# Altium PCB 01_UNROUTED_PLACEMENT.PcbDoc (part 4 of 4)
Units mil, origin at the board's own origin, x right, y up, seen from the top; angles counter-clockwise.
Board outline 3149.61 x 1771.65 mil, 4 copper layers (L1 TOP, L2 GND, L3 POWER SIGNAL, L4 BOTTOM GND), stack 45.835 mil thick; 209 components, 132 nets, 746 pads, 5 vias.
Unrouted connection lines stored in the file: 533.
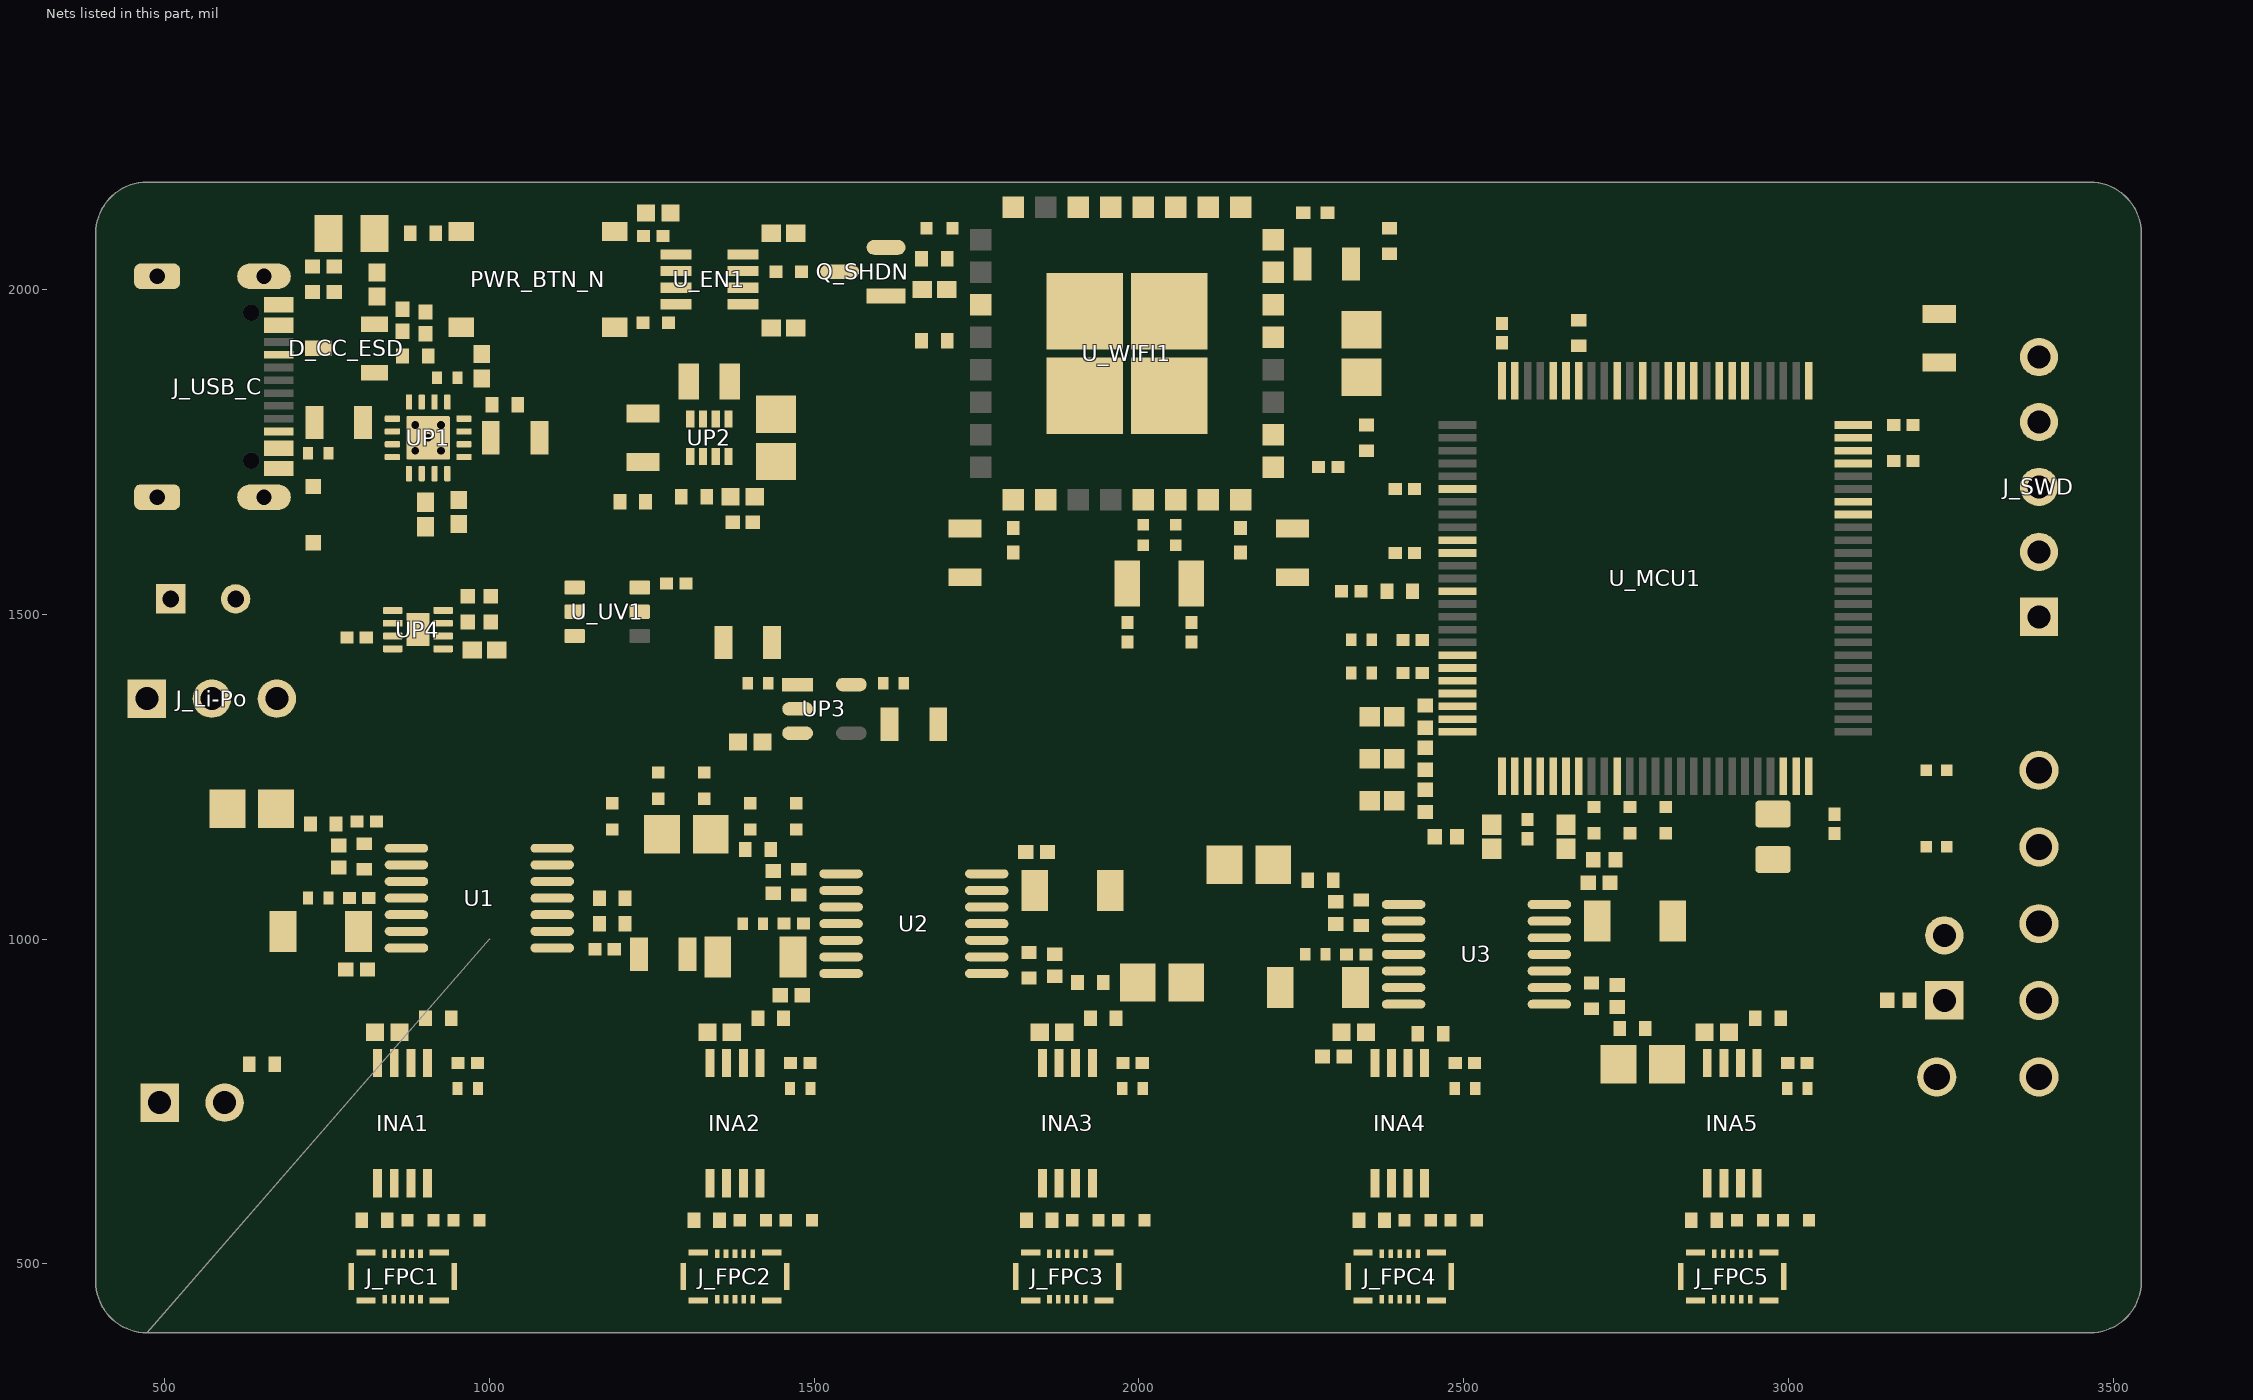
[diagram p2: the nets of this part, all layers, seen from the top]

## Part data (continued)
RDD8: library part EMG_R5_RDD8, "-55℃~+155℃ 50V 5kΩ 63mW Thin Film Resistor ±0.1% ±25ppm/℃ 0402 Chip Resistor - Surface Mount ROH", LCSC Part=C5948099, Manufacturer="Viking Tech", Package=AR0402, Power Rating=0.0625W, Resistance=5KΩ, Temperature="-55°C to +155°C", Temperature Range High=+155°C, Temperature Range Low=-55°C, Tolerance=±0.1%, Voltage Rating=50V, Automotive=No, Automotive Grade="Grade 0", Category="Resistors/Chip Resistor - Surface Mount", ComponentLink2Description=Datasheet, ComponentLink2URL=https://www.viking.com.tw/Templates/att/Thin%20Film%20Resistor%20short%20form.pdf, Composition="Thin Film", Controlled Revision="R5 2026-09-16; project-local frozen symbol/footprint", Device Class L1="Passive Components", Device Class L2=Resistors, Device Class L3="Chip SMD Resistors", Footprint Url=https://www.viking.com.tw/Templates/att/Thin%20Film%20Resistor%20short%20form.pdf, Height=0.35mm, Ipc Land Pattern Name=RESC10050X32, Lead Free=Yes, Manufacturer Part Number=AR02BTC5001, Octopart=https://octopart.com/datasheet/viking-tech/AR02BTC5001, RoHS=TRUE, Series=AR
RDD9: library part EMG_R5_RDD9, Package=None, Availability=Unavailable, Controlled Revision="R5 2026-09-16; project-local frozen symbol/footprint", MP=ERA2ARB103X, Price=None
RDD10: library part EMG_R5_RDD10, Package=None, Availability=Unavailable, Controlled Revision="R5 2026-09-16; project-local frozen symbol/footprint", MP=ERA2ARB103X, Price=None
RDD11: library part EMG_R5_RDD11, "-55℃~+155℃ 50V 5kΩ 63mW Thin Film Resistor ±0.1% ±25ppm/℃ 0402 Chip Resistor - Surface Mount ROH", LCSC Part=C5948099, Manufacturer="Viking Tech", Package=AR0402, Power Rating=0.0625W, Resistance=5KΩ, Temperature="-55°C to +155°C", Temperature Range High=+155°C, Temperature Range Low=-55°C, Tolerance=±0.1%, Voltage Rating=50V, Automotive=No, Automotive Grade="Grade 0", Category="Resistors/Chip Resistor - Surface Mount", ComponentLink2Description=Datasheet, ComponentLink2URL=https://www.viking.com.tw/Templates/att/Thin%20Film%20Resistor%20short%20form.pdf, Composition="Thin Film", Controlled Revision="R5 2026-09-16; project-local frozen symbol/footprint", Device Class L1="Passive Components", Device Class L2=Resistors, Device Class L3="Chip SMD Resistors", Footprint Url=https://www.viking.com.tw/Templates/att/Thin%20Film%20Resistor%20short%20form.pdf, Height=0.35mm, Ipc Land Pattern Name=RESC10050X32, Lead Free=Yes, Manufacturer Part Number=AR02BTC5001, Octopart=https://octopart.com/datasheet/viking-tech/AR02BTC5001, RoHS=TRUE, Series=AR
RDD12: library part EMG_R5_RDD12, Package=None, Availability=Unavailable, Controlled Revision="R5 2026-09-16; project-local frozen symbol/footprint", MP=ERA2ARB103X, Price=None
RDD13: library part EMG_R5_RDD13, Package=None, Availability=Unavailable, Controlled Revision="R5 2026-09-16; project-local frozen symbol/footprint", MP=ERA2ARB103X, Price=None
RDD14: library part EMG_R5_RDD14, "-55℃~+155℃ 50V 5kΩ 63mW Thin Film Resistor ±0.1% ±25ppm/℃ 0402 Chip Resistor - Surface Mount ROH", LCSC Part=C5948099, Manufacturer="Viking Tech", Package=AR0402, Power Rating=0.0625W, Resistance=5KΩ, Temperature="-55°C to +155°C", Temperature Range High=+155°C, Temperature Range Low=-55°C, Tolerance=±0.1%, Voltage Rating=50V, Automotive=No, Automotive Grade="Grade 0", Category="Resistors/Chip Resistor - Surface Mount", ComponentLink2Description=Datasheet, ComponentLink2URL=https://www.viking.com.tw/Templates/att/Thin%20Film%20Resistor%20short%20form.pdf, Composition="Thin Film", Controlled Revision="R5 2026-09-16; project-local frozen symbol/footprint", Device Class L1="Passive Components", Device Class L2=Resistors, Device Class L3="Chip SMD Resistors", Footprint Url=https://www.viking.com.tw/Templates/att/Thin%20Film%20Resistor%20short%20form.pdf, Height=0.35mm, Ipc Land Pattern Name=RESC10050X32, Lead Free=Yes, Manufacturer Part Number=AR02BTC5001, Octopart=https://octopart.com/datasheet/viking-tech/AR02BTC5001, RoHS=TRUE, Series=AR
RDD15: library part EMG_R5_RDD15, Package=None, Availability=Unavailable, Controlled Revision="R5 2026-09-16; project-local frozen symbol/footprint", MP=ERA2ARB103X, Price=None
RG_1: library part EMG_R5_RG_1, "RES SMD 80.6KOHM 0.1% 1/16W 0402", Manufacturer=Yageo, Package=RT0402, Power Rating=0.063W, Resistance=80.6KΩ, Temperature="-55°C to +155°C", Temperature Coefficient="25 ppm/°C", Temperature Range High=+155°C, Temperature Range Low=-55°C, Tolerance=0.001, Voltage Rating=50V, Automotive=No, Category=Res, ComponentLink2Description=Datasheet, ComponentLink2URL=http://www.yageo.com/documents/recent/PYu-RT_1-to-0.01_RoHS_L_9.pdf, Composition="Thin Film", Controlled Revision="R5 2026-09-16; project-local frozen symbol/footprint", Device Class L1="Passive Components", Device Class L2=Resistors, Device Class L3="Chip SMD Resistors", Digikey Description="RES SMD 80.6KOHM 0.1% 1/16W 0402", Footprint Url=http://www.yageo.com/exep/pages/download/literatures/PYu-R_Mount_10.pdf, Height=0.35mm, Ipc Land Pattern Name=RESC10050X30, Lead Free=Yes, Manufacturer Part Number=RT0402BRD0780K6L, Mouser Description="Thin Film Resistors 1/16W 80.6K ohm .1% 25ppm", Octopart=https://octopart.com/rt0402brd0780k6l-yageo-1468076, RoHS=TRUE, Series=RT
RG_2: library part EMG_R5_RG_2, "RES SMD 80.6KOHM 0.1% 1/16W 0402", Manufacturer=Yageo, Package=RT0402, Power Rating=0.063W, Resistance=80.6KΩ, Temperature="-55°C to +155°C", Temperature Coefficient="25 ppm/°C", Temperature Range High=+155°C, Temperature Range Low=-55°C, Tolerance=0.001, Voltage Rating=50V, Automotive=No, Category=Res, ComponentLink2Description=Datasheet, ComponentLink2URL=http://www.yageo.com/documents/recent/PYu-RT_1-to-0.01_RoHS_L_9.pdf, Composition="Thin Film", Controlled Revision="R5 2026-09-16; project-local frozen symbol/footprint", Device Class L1="Passive Components", Device Class L2=Resistors, Device Class L3="Chip SMD Resistors", Digikey Description="RES SMD 80.6KOHM 0.1% 1/16W 0402", Footprint Url=http://www.yageo.com/exep/pages/download/literatures/PYu-R_Mount_10.pdf, Height=0.35mm, Ipc Land Pattern Name=RESC10050X30, Lead Free=Yes, Manufacturer Part Number=RT0402BRD0780K6L, Mouser Description="Thin Film Resistors 1/16W 80.6K ohm .1% 25ppm", Octopart=https://octopart.com/rt0402brd0780k6l-yageo-1468076, RoHS=TRUE, Series=RT
RG_3: library part EMG_R5_RG_3, "RES SMD 80.6KOHM 0.1% 1/16W 0402", Manufacturer=Yageo, Package=RT0402, Power Rating=0.063W, Resistance=80.6KΩ, Temperature="-55°C to +155°C", Temperature Coefficient="25 ppm/°C", Temperature Range High=+155°C, Temperature Range Low=-55°C, Tolerance=0.001, Voltage Rating=50V, Automotive=No, Category=Res, ComponentLink2Description=Datasheet, ComponentLink2URL=http://www.yageo.com/documents/recent/PYu-RT_1-to-0.01_RoHS_L_9.pdf, Composition="Thin Film", Controlled Revision="R5 2026-09-16; project-local frozen symbol/footprint", Device Class L1="Passive Components", Device Class L2=Resistors, Device Class L3="Chip SMD Resistors", Digikey Description="RES SMD 80.6KOHM 0.1% 1/16W 0402", Footprint Url=http://www.yageo.com/exep/pages/download/literatures/PYu-R_Mount_10.pdf, Height=0.35mm, Ipc Land Pattern Name=RESC10050X30, Lead Free=Yes, Manufacturer Part Number=RT0402BRD0780K6L, Mouser Description="Thin Film Resistors 1/16W 80.6K ohm .1% 25ppm", Octopart=https://octopart.com/rt0402brd0780k6l-yageo-1468076, RoHS=TRUE, Series=RT
RG_4: library part EMG_R5_RG_4, "RES SMD 80.6KOHM 0.1% 1/16W 0402", Manufacturer=Yageo, Package=RT0402, Power Rating=0.063W, Resistance=80.6KΩ, Temperature="-55°C to +155°C", Temperature Coefficient="25 ppm/°C", Temperature Range High=+155°C, Temperature Range Low=-55°C, Tolerance=0.001, Voltage Rating=50V, Automotive=No, Category=Res, ComponentLink2Description=Datasheet, ComponentLink2URL=http://www.yageo.com/documents/recent/PYu-RT_1-to-0.01_RoHS_L_9.pdf, Composition="Thin Film", Controlled Revision="R5 2026-09-16; project-local frozen symbol/footprint", Device Class L1="Passive Components", Device Class L2=Resistors, Device Class L3="Chip SMD Resistors", Digikey Description="RES SMD 80.6KOHM 0.1% 1/16W 0402", Footprint Url=http://www.yageo.com/exep/pages/download/literatures/PYu-R_Mount_10.pdf, Height=0.35mm, Ipc Land Pattern Name=RESC10050X30, Lead Free=Yes, Manufacturer Part Number=RT0402BRD0780K6L, Mouser Description="Thin Film Resistors 1/16W 80.6K ohm .1% 25ppm", Octopart=https://octopart.com/rt0402brd0780k6l-yageo-1468076, RoHS=TRUE, Series=RT
RG_5: library part EMG_R5_RG_5, "RES SMD 80.6KOHM 0.1% 1/16W 0402", Manufacturer=Yageo, Package=RT0402, Power Rating=0.063W, Resistance=80.6KΩ, Temperature="-55°C to +155°C", Temperature Coefficient="25 ppm/°C", Temperature Range High=+155°C, Temperature Range Low=-55°C, Tolerance=0.001, Voltage Rating=50V, Automotive=No, Category=Res, ComponentLink2Description=Datasheet, ComponentLink2URL=http://www.yageo.com/documents/recent/PYu-RT_1-to-0.01_RoHS_L_9.pdf, Composition="Thin Film", Controlled Revision="R5 2026-09-16; project-local frozen symbol/footprint", Device Class L1="Passive Components", Device Class L2=Resistors, Device Class L3="Chip SMD Resistors", Digikey Description="RES SMD 80.6KOHM 0.1% 1/16W 0402", Footprint Url=http://www.yageo.com/exep/pages/download/literatures/PYu-R_Mount_10.pdf, Height=0.35mm, Ipc Land Pattern Name=RESC10050X30, Lead Free=Yes, Manufacturer Part Number=RT0402BRD0780K6L, Mouser Description="Thin Film Resistors 1/16W 80.6K ohm .1% 25ppm", Octopart=https://octopart.com/rt0402brd0780k6l-yageo-1468076, RoHS=TRUE, Series=RT
RGN_1: library part EMG_R5_RGN_1, "RES 10.0K OHM 1/16W .1% SMD 0402", Manufacturer=Yageo, Package=RT0402, Power Rating=0.063W, Resistance=10KΩ, Temperature="-55°C to +155°C", Temperature Coefficient="25 ppm/°C", Temperature Range High=+155°C, Temperature Range Low=-55°C, Tolerance=0.001, Voltage Rating=50V, Automotive=No, Category=Res, ComponentLink2Description=Datasheet, ComponentLink2URL=http://www.yageo.com/documents/recent/PYu-RT_1-to-0.01_RoHS_L_9.pdf, Composition="Thin Film", Controlled Revision="R5 2026-09-16; project-local frozen symbol/footprint", Device Class L1="Passive Components", Device Class L2=Resistors, Device Class L3="Chip SMD Resistors", Digikey Description="RES 10.0K OHM 1/16W .1% SMD 0402", Footprint Url=http://www.yageo.com/exep/pages/download/literatures/PYu-R_Mount_10.pdf, Height=0.35mm, Ipc Land Pattern Name=RESC10050X30, Lead Free=Yes, Manufacturer Part Number=RT0402BRD0710KL, Mouser Description="Thin Film Resistors - SMD 10K ohm 0.1% 1/16W", Octopart=https://octopart.com/rt0402brd0710kl-yageo-1181432, RoHS=TRUE, Series=RT
RGN_2: library part EMG_R5_RGN_2, "RES 10.0K OHM 1/16W .1% SMD 0402", Manufacturer=Yageo, Package=RT0402, Power Rating=0.063W, Resistance=10KΩ, Temperature="-55°C to +155°C", Temperature Coefficient="25 ppm/°C", Temperature Range High=+155°C, Temperature Range Low=-55°C, Tolerance=0.001, Voltage Rating=50V, Automotive=No, Category=Res, ComponentLink2Description=Datasheet, ComponentLink2URL=http://www.yageo.com/documents/recent/PYu-RT_1-to-0.01_RoHS_L_9.pdf, Composition="Thin Film", Controlled Revision="R5 2026-09-16; project-local frozen symbol/footprint", Device Class L1="Passive Components", Device Class L2=Resistors, Device Class L3="Chip SMD Resistors", Digikey Description="RES 10.0K OHM 1/16W .1% SMD 0402", Footprint Url=http://www.yageo.com/exep/pages/download/literatures/PYu-R_Mount_10.pdf, Height=0.35mm, Ipc Land Pattern Name=RESC10050X30, Lead Free=Yes, Manufacturer Part Number=RT0402BRD0710KL, Mouser Description="Thin Film Resistors - SMD 10K ohm 0.1% 1/16W", Octopart=https://octopart.com/rt0402brd0710kl-yageo-1181432, RoHS=TRUE, Series=RT
RGN_3: library part EMG_R5_RGN_3, "RES 10.0K OHM 1/16W .1% SMD 0402", Manufacturer=Yageo, Package=RT0402, Power Rating=0.063W, Resistance=10KΩ, Temperature="-55°C to +155°C", Temperature Coefficient="25 ppm/°C", Temperature Range High=+155°C, Temperature Range Low=-55°C, Tolerance=0.001, Voltage Rating=50V, Automotive=No, Category=Res, ComponentLink2Description=Datasheet, ComponentLink2URL=http://www.yageo.com/documents/recent/PYu-RT_1-to-0.01_RoHS_L_9.pdf, Composition="Thin Film", Controlled Revision="R5 2026-09-16; project-local frozen symbol/footprint", Device Class L1="Passive Components", Device Class L2=Resistors, Device Class L3="Chip SMD Resistors", Digikey Description="RES 10.0K OHM 1/16W .1% SMD 0402", Footprint Url=http://www.yageo.com/exep/pages/download/literatures/PYu-R_Mount_10.pdf, Height=0.35mm, Ipc Land Pattern Name=RESC10050X30, Lead Free=Yes, Manufacturer Part Number=RT0402BRD0710KL, Mouser Description="Thin Film Resistors - SMD 10K ohm 0.1% 1/16W", Octopart=https://octopart.com/rt0402brd0710kl-yageo-1181432, RoHS=TRUE, Series=RT
RGN_4: library part EMG_R5_RGN_4, "RES 10.0K OHM 1/16W .1% SMD 0402", Manufacturer=Yageo, Package=RT0402, Power Rating=0.063W, Resistance=10KΩ, Temperature="-55°C to +155°C", Temperature Coefficient="25 ppm/°C", Temperature Range High=+155°C, Temperature Range Low=-55°C, Tolerance=0.001, Voltage Rating=50V, Automotive=No, Category=Res, ComponentLink2Description=Datasheet, ComponentLink2URL=http://www.yageo.com/documents/recent/PYu-RT_1-to-0.01_RoHS_L_9.pdf, Composition="Thin Film", Controlled Revision="R5 2026-09-16; project-local frozen symbol/footprint", Device Class L1="Passive Components", Device Class L2=Resistors, Device Class L3="Chip SMD Resistors", Digikey Description="RES 10.0K OHM 1/16W .1% SMD 0402", Footprint Url=http://www.yageo.com/exep/pages/download/literatures/PYu-R_Mount_10.pdf, Height=0.35mm, Ipc Land Pattern Name=RESC10050X30, Lead Free=Yes, Manufacturer Part Number=RT0402BRD0710KL, Mouser Description="Thin Film Resistors - SMD 10K ohm 0.1% 1/16W", Octopart=https://octopart.com/rt0402brd0710kl-yageo-1181432, RoHS=TRUE, Series=RT
RGN_5: library part EMG_R5_RGN_5, "RES 10.0K OHM 1/16W .1% SMD 0402", Manufacturer=Yageo, Package=RT0402, Power Rating=0.063W, Resistance=10KΩ, Temperature="-55°C to +155°C", Temperature Coefficient="25 ppm/°C", Temperature Range High=+155°C, Temperature Range Low=-55°C, Tolerance=0.001, Voltage Rating=50V, Automotive=No, Category=Res, ComponentLink2Description=Datasheet, ComponentLink2URL=http://www.yageo.com/documents/recent/PYu-RT_1-to-0.01_RoHS_L_9.pdf, Composition="Thin Film", Controlled Revision="R5 2026-09-16; project-local frozen symbol/footprint", Device Class L1="Passive Components", Device Class L2=Resistors, Device Class L3="Chip SMD Resistors", Digikey Description="RES 10.0K OHM 1/16W .1% SMD 0402", Footprint Url=http://www.yageo.com/exep/pages/download/literatures/PYu-R_Mount_10.pdf, Height=0.35mm, Ipc Land Pattern Name=RESC10050X30, Lead Free=Yes, Manufacturer Part Number=RT0402BRD0710KL, Mouser Description="Thin Film Resistors - SMD 10K ohm 0.1% 1/16W", Octopart=https://octopart.com/rt0402brd0710kl-yageo-1181432, RoHS=TRUE, Series=RT
RH_1: library part EMG_R5_RH_1, "RES 26.1kΩ ±0.1% 0.063W 0402", Case Code (Imperial)=0402, Case Code (Metric)=1005, JLCPCB Part=C2075472, Manufacturer=PANASONIC, Max Operating Temperature=155°C, Max Power Dissipation=63mW, Min Operating Temperature=-55°C, Power Rating=62.5mW, Resistance=26.1kR, Resistor Type="Thin Film", Temperature Coefficient=25ppm/°C, Tolerance=0.1%, Voltage Rating=50V, Case/Package=0402, Controlled Revision="R5 2026-09-16; project-local frozen symbol/footprint", Features="Moisture Resistant", Height=0.015inch, Length=0.039inch, Number of Terminations=2, Packaging="Tape and Reel", RoHS Compliant=Yes, Series=ERA-2A, Termination=SMD/SMT, Width=0.5mm
RH_2: library part EMG_R5_RH_2, "RES 26.1kΩ ±0.1% 0.063W 0402", Case Code (Imperial)=0402, Case Code (Metric)=1005, JLCPCB Part=C2075472, Manufacturer=PANASONIC, Max Operating Temperature=155°C, Max Power Dissipation=63mW, Min Operating Temperature=-55°C, Power Rating=62.5mW, Resistance=26.1kR, Resistor Type="Thin Film", Temperature Coefficient=25ppm/°C, Tolerance=0.1%, Voltage Rating=50V, Case/Package=0402, Controlled Revision="R5 2026-09-16; project-local frozen symbol/footprint", Features="Moisture Resistant", Height=0.015inch, Length=0.039inch, Number of Terminations=2, Packaging="Tape and Reel", RoHS Compliant=Yes, Series=ERA-2A, Termination=SMD/SMT, Width=0.5mm
RH_3: library part EMG_R5_RH_3, "RES 26.1kΩ ±0.1% 0.063W 0402", Case Code (Imperial)=0402, Case Code (Metric)=1005, JLCPCB Part=C2075472, Manufacturer=PANASONIC, Max Operating Temperature=155°C, Max Power Dissipation=63mW, Min Operating Temperature=-55°C, Power Rating=62.5mW, Resistance=26.1kR, Resistor Type="Thin Film", Temperature Coefficient=25ppm/°C, Tolerance=0.1%, Voltage Rating=50V, Case/Package=0402, Controlled Revision="R5 2026-09-16; project-local frozen symbol/footprint", Features="Moisture Resistant", Height=0.015inch, Length=0.039inch, Number of Terminations=2, Packaging="Tape and Reel", RoHS Compliant=Yes, Series=ERA-2A, Termination=SMD/SMT, Width=0.5mm
RH_4: library part EMG_R5_RH_4, "RES 26.1kΩ ±0.1% 0.063W 0402", Case Code (Imperial)=0402, Case Code (Metric)=1005, JLCPCB Part=C2075472, Manufacturer=PANASONIC, Max Operating Temperature=155°C, Max Power Dissipation=63mW, Min Operating Temperature=-55°C, Power Rating=62.5mW, Resistance=26.1kR, Resistor Type="Thin Film", Temperature Coefficient=25ppm/°C, Tolerance=0.1%, Voltage Rating=50V, Case/Package=0402, Controlled Revision="R5 2026-09-16; project-local frozen symbol/footprint", Features="Moisture Resistant", Height=0.015inch, Length=0.039inch, Number of Terminations=2, Packaging="Tape and Reel", RoHS Compliant=Yes, Series=ERA-2A, Termination=SMD/SMT, Width=0.5mm
RH_5: library part EMG_R5_RH_5, "RES 26.1kΩ ±0.1% 0.063W 0402", Case Code (Imperial)=0402, Case Code (Metric)=1005, JLCPCB Part=C2075472, Manufacturer=PANASONIC, Max Operating Temperature=155°C, Max Power Dissipation=63mW, Min Operating Temperature=-55°C, Power Rating=62.5mW, Resistance=26.1kR, Resistor Type="Thin Film", Temperature Coefficient=25ppm/°C, Tolerance=0.1%, Voltage Rating=50V, Case/Package=0402, Controlled Revision="R5 2026-09-16; project-local frozen symbol/footprint", Features="Moisture Resistant", Height=0.015inch, Length=0.039inch, Number of Terminations=2, Packaging="Tape and Reel", RoHS Compliant=Yes, Series=ERA-2A, Termination=SMD/SMT, Width=0.5mm
RISET: library part EMG_R5_RISET, Manufacturer=Yageo, Controlled Revision="R5 2026-09-16; project-local frozen symbol/footprint", Part Number=RC0402FR-072K94L
RJ1: library part EMG_R5_RJ1, Manufacturer="Yageo / Phycomp", Controlled Revision="R5 2026-09-16; project-local frozen symbol/footprint", Part Number=RC0402FR-075K1L
RJ2: library part EMG_R5_RJ2, Manufacturer="Yageo / Phycomp", Controlled Revision="R5 2026-09-16; project-local frozen symbol/footprint", Part Number=RC0402FR-075K1L
RL_1: library part EMG_R5_RL_1, "RES SMD 1.07K OHM 0.1% 1/16W", Manufacturer=Yageo, Package=RT0402, Power Rating=0.063W, Resistance=1.07KΩ, Temperature="-55°C to +155°C", Temperature Coefficient="25 ppm/°C", Temperature Range High=+155°C, Temperature Range Low=-55°C, Tolerance=0.001, Voltage Rating=50V, Automotive=No, Category=Res, ComponentLink2Description=Datasheet, ComponentLink2URL=http://www.yageo.com/documents/recent/PYu-RT_1-to-0.01_RoHS_L_9.pdf, Composition="Thin Film", Controlled Revision="R5 2026-09-16; project-local frozen symbol/footprint", Device Class L1="Passive Components", Device Class L2=Resistors, Device Class L3="Chip SMD Resistors", Digikey Description="RES SMD 1.07K OHM 0.1% 1/16W", Footprint Url=http://www.yageo.com/exep/pages/download/literatures/PYu-R_Mount_10.pdf, Height=0.35mm, Ipc Land Pattern Name=RESC10050X30, Lead Free=Yes, Manufacturer Part Number=RT0402BRD071K07L, Mouser Description="Thin Film Resistors 1/16W 1.07K ohm .1% 25ppm", Octopart=https://octopart.com/rt0402brd071k07l-yageo-1400807, RoHS=TRUE, Series=RT
RL_2: library part EMG_R5_RL_2, "RES SMD 1.07K OHM 0.1% 1/16W", Manufacturer=Yageo, Package=RT0402, Power Rating=0.063W, Resistance=1.07KΩ, Temperature="-55°C to +155°C", Temperature Coefficient="25 ppm/°C", Temperature Range High=+155°C, Temperature Range Low=-55°C, Tolerance=0.001, Voltage Rating=50V, Automotive=No, Category=Res, ComponentLink2Description=Datasheet, ComponentLink2URL=http://www.yageo.com/documents/recent/PYu-RT_1-to-0.01_RoHS_L_9.pdf, Composition="Thin Film", Controlled Revision="R5 2026-09-16; project-local frozen symbol/footprint", Device Class L1="Passive Components", Device Class L2=Resistors, Device Class L3="Chip SMD Resistors", Digikey Description="RES SMD 1.07K OHM 0.1% 1/16W", Footprint Url=http://www.yageo.com/exep/pages/download/literatures/PYu-R_Mount_10.pdf, Height=0.35mm, Ipc Land Pattern Name=RESC10050X30, Lead Free=Yes, Manufacturer Part Number=RT0402BRD071K07L, Mouser Description="Thin Film Resistors 1/16W 1.07K ohm .1% 25ppm", Octopart=https://octopart.com/rt0402brd071k07l-yageo-1400807, RoHS=TRUE, Series=RT
RL_3: library part EMG_R5_RL_3, "RES SMD 1.07K OHM 0.1% 1/16W", Manufacturer=Yageo, Package=RT0402, Power Rating=0.063W, Resistance=1.07KΩ, Temperature="-55°C to +155°C", Temperature Coefficient="25 ppm/°C", Temperature Range High=+155°C, Temperature Range Low=-55°C, Tolerance=0.001, Voltage Rating=50V, Automotive=No, Category=Res, ComponentLink2Description=Datasheet, ComponentLink2URL=http://www.yageo.com/documents/recent/PYu-RT_1-to-0.01_RoHS_L_9.pdf, Composition="Thin Film", Controlled Revision="R5 2026-09-16; project-local frozen symbol/footprint", Device Class L1="Passive Components", Device Class L2=Resistors, Device Class L3="Chip SMD Resistors", Digikey Description="RES SMD 1.07K OHM 0.1% 1/16W", Footprint Url=http://www.yageo.com/exep/pages/download/literatures/PYu-R_Mount_10.pdf, Height=0.35mm, Ipc Land Pattern Name=RESC10050X30, Lead Free=Yes, Manufacturer Part Number=RT0402BRD071K07L, Mouser Description="Thin Film Resistors 1/16W 1.07K ohm .1% 25ppm", Octopart=https://octopart.com/rt0402brd071k07l-yageo-1400807, RoHS=TRUE, Series=RT
RL_4: library part EMG_R5_RL_4, "RES SMD 1.07K OHM 0.1% 1/16W", Manufacturer=Yageo, Package=RT0402, Power Rating=0.063W, Resistance=1.07KΩ, Temperature="-55°C to +155°C", Temperature Coefficient="25 ppm/°C", Temperature Range High=+155°C, Temperature Range Low=-55°C, Tolerance=0.001, Voltage Rating=50V, Automotive=No, Category=Res, ComponentLink2Description=Datasheet, ComponentLink2URL=http://www.yageo.com/documents/recent/PYu-RT_1-to-0.01_RoHS_L_9.pdf, Composition="Thin Film", Controlled Revision="R5 2026-09-16; project-local frozen symbol/footprint", Device Class L1="Passive Components", Device Class L2=Resistors, Device Class L3="Chip SMD Resistors", Digikey Description="RES SMD 1.07K OHM 0.1% 1/16W", Footprint Url=http://www.yageo.com/exep/pages/download/literatures/PYu-R_Mount_10.pdf, Height=0.35mm, Ipc Land Pattern Name=RESC10050X30, Lead Free=Yes, Manufacturer Part Number=RT0402BRD071K07L, Mouser Description="Thin Film Resistors 1/16W 1.07K ohm .1% 25ppm", Octopart=https://octopart.com/rt0402brd071k07l-yageo-1400807, RoHS=TRUE, Series=RT
RL_5: library part EMG_R5_RL_5, "RES SMD 1.07K OHM 0.1% 1/16W", Manufacturer=Yageo, Package=RT0402, Power Rating=0.063W, Resistance=1.07KΩ, Temperature="-55°C to +155°C", Temperature Coefficient="25 ppm/°C", Temperature Range High=+155°C, Temperature Range Low=-55°C, Tolerance=0.001, Voltage Rating=50V, Automotive=No, Category=Res, ComponentLink2Description=Datasheet, ComponentLink2URL=http://www.yageo.com/documents/recent/PYu-RT_1-to-0.01_RoHS_L_9.pdf, Composition="Thin Film", Controlled Revision="R5 2026-09-16; project-local frozen symbol/footprint", Device Class L1="Passive Components", Device Class L2=Resistors, Device Class L3="Chip SMD Resistors", Digikey Description="RES SMD 1.07K OHM 0.1% 1/16W", Footprint Url=http://www.yageo.com/exep/pages/download/literatures/PYu-R_Mount_10.pdf, Height=0.35mm, Ipc Land Pattern Name=RESC10050X30, Lead Free=Yes, Manufacturer Part Number=RT0402BRD071K07L, Mouser Description="Thin Film Resistors 1/16W 1.07K ohm .1% 25ppm", Octopart=https://octopart.com/rt0402brd071k07l-yageo-1400807, RoHS=TRUE, Series=RT
Rservo_1: library part EMG_R5_Rservo_1, Manufacturer="Yageo / Phycomp", Controlled Revision="R5 2026-09-16; project-local frozen symbol/footprint", Part Number=RC0402FR-072ML
Rservo_2: library part EMG_R5_Rservo_2, Manufacturer="Yageo / Phycomp", Controlled Revision="R5 2026-09-16; project-local frozen symbol/footprint", Part Number=RC0402FR-072ML
Rservo_3: library part EMG_R5_Rservo_3, Manufacturer="Yageo / Phycomp", Controlled Revision="R5 2026-09-16; project-local frozen symbol/footprint", Part Number=RC0402FR-072ML
Rservo_4: library part EMG_R5_Rservo_4, Manufacturer="Yageo / Phycomp", Controlled Revision="R5 2026-09-16; project-local frozen symbol/footprint", Part Number=RC0402FR-072ML
Rservo_5: library part EMG_R5_Rservo_5, Manufacturer="Yageo / Phycomp", Controlled Revision="R5 2026-09-16; project-local frozen symbol/footprint", Part Number=RC0402FR-072ML
RUP_3: library part EMG_R5_RUP_3, "RES 560kΩ ±1% 0.063W 0402", Case/Package=0402, Max Operating Temperature=155°C, Max Power Dissipation=63mW, Min Operating Temperature=-55°C, Resistance=560kR, Resistor Type="Thick Film", Temperature Coefficient=100ppm/°C, Tolerance=1%, Controlled Revision="R5 2026-09-16; project-local frozen symbol/footprint", Features="Moisture Resistant", Height=0.015inch, Length=0.039inch, Number of Terminations=2, Packaging="Tape and Reel", RoHS Compliant=Yes, Series=AC, Width=0.02inch
RUP_4: library part EMG_R5_RUP_4, "AC0402 100KΩ 0.0625W 1.00%", Manufacturer=Yageo, Package=AC0402, Power Rating=0.0625W, Resistance=100KΩ, Temperature="-55°C to +155°C", Temperature Range High=+155°C, Temperature Range Low=-55°C, Tolerance=0.01, Voltage Rating=50V, Automotive=Yes, Automotive Grade="Grade 0", Category=Res, ComponentLink2Description=Datasheet, ComponentLink2URL=http://www.yageo.com/documents/recent/PYu-AC_51_RoHS_L_6.pdf, Composition="Thick Film", Controlled Revision="R5 2026-09-16; project-local frozen symbol/footprint", Device Class L1="Passive Components", Device Class L2=Resistors, Device Class L3="Chip SMD Resistors", Footprint Url=http://www.yageo.com/exep/pages/download/literatures/PYu-R_Mount_10.pdf, Height=0.37mm, Ipc Land Pattern Name=RESC10050X32, Lead Free=Yes, Manufacturer Part Number=AC0402FR-7D100KL, Octopart=https://octopart.com/ac0402fr-7d100kl-yageo-91024821, RoHS=TRUE, Series=AC
RV1: library part EMG_R5_RV1, "AC0402 100KΩ 0.0625W 1.00%", Manufacturer=Yageo, Package=AC0402, Power Rating=0.0625W, Resistance=100KΩ, Temperature="-55°C to +155°C", Temperature Range High=+155°C, Temperature Range Low=-55°C, Tolerance=0.01, Voltage Rating=50V, Automotive=Yes, Automotive Grade="Grade 0", Category=Res, ComponentLink2Description=Datasheet, ComponentLink2URL=http://www.yageo.com/documents/recent/PYu-AC_51_RoHS_L_6.pdf, Composition="Thick Film", Controlled Revision="R5 2026-09-16; project-local frozen symbol/footprint", Device Class L1="Passive Components", Device Class L2=Resistors, Device Class L3="Chip SMD Resistors", Footprint Url=http://www.yageo.com/exep/pages/download/literatures/PYu-R_Mount_10.pdf, Height=0.37mm, Ipc Land Pattern Name=RESC10050X32, Lead Free=Yes, Manufacturer Part Number=AC0402FR-7D100KL, Octopart=https://octopart.com/ac0402fr-7d100kl-yageo-91024821, RoHS=TRUE, Series=AC
RV2: library part EMG_R5_RV2, "AC0402 100KΩ 0.0625W 1.00%", Manufacturer=Yageo, Package=AC0402, Power Rating=0.0625W, Resistance=100KΩ, Temperature="-55°C to +155°C", Temperature Range High=+155°C, Temperature Range Low=-55°C, Tolerance=0.01, Voltage Rating=50V, Automotive=Yes, Automotive Grade="Grade 0", Category=Res, ComponentLink2Description=Datasheet, ComponentLink2URL=http://www.yageo.com/documents/recent/PYu-AC_51_RoHS_L_6.pdf, Composition="Thick Film", Controlled Revision="R5 2026-09-16; project-local frozen symbol/footprint", Device Class L1="Passive Components", Device Class L2=Resistors, Device Class L3="Chip SMD Resistors", Footprint Url=http://www.yageo.com/exep/pages/download/literatures/PYu-R_Mount_10.pdf, Height=0.37mm, Ipc Land Pattern Name=RESC10050X32, Lead Free=Yes, Manufacturer Part Number=AC0402FR-7D100KL, Octopart=https://octopart.com/ac0402fr-7d100kl-yageo-91024821, RoHS=TRUE, Series=AC
TP_GND: library part EMG_R5_TP_GND, "UltraLow Profile THM Test Point-No Base", Package=None, Check_prices=https://www.snapeda.com/parts/5021/Keystone/view-part/?ref=eda, Controlled Revision="R5 2026-09-16; project-local frozen symbol/footprint", MF="Keystone Electronics", MP=5021, SnapEDA_Link=https://www.snapeda.com/parts/5021/Keystone/view-part/?ref=snap
TP_MCU_BOOT0: library part EMG_R5_TP_MCU_BOOT0, "UltraLow Profile THM Test Point-No Base", Package=None, Check_prices=https://www.snapeda.com/parts/5021/Keystone/view-part/?ref=eda, Controlled Revision="R5 2026-09-16; project-local frozen symbol/footprint", MF="Keystone Electronics", MP=5021, SnapEDA_Link=https://www.snapeda.com/parts/5021/Keystone/view-part/?ref=snap
TP_WIFI_BOOT: library part EMG_R5_TP_WIFI_BOOT, "UltraLow Profile THM Test Point-No Base", Package=None, Check_prices=https://www.snapeda.com/parts/5021/Keystone/view-part/?ref=eda, Controlled Revision="R5 2026-09-16; project-local frozen symbol/footprint", MF="Keystone Electronics", MP=5021, SnapEDA_Link=https://www.snapeda.com/parts/5021/Keystone/view-part/?ref=snap
TP_WIFI_CHIP_EN: library part EMG_R5_TP_WIFI_CHIP_EN, "UltraLow Profile THM Test Point-No Base", Package=None, Check_prices=https://www.snapeda.com/parts/5021/Keystone/view-part/?ref=eda, Controlled Revision="R5 2026-09-16; project-local frozen symbol/footprint", MF="Keystone Electronics", MP=5021, SnapEDA_Link=https://www.snapeda.com/parts/5021/Keystone/view-part/?ref=snap
TP_WIFI_UART_RX: library part EMG_R5_TP_WIFI_UART_RX, "UltraLow Profile THM Test Point-No Base", Package=None, Check_prices=https://www.snapeda.com/parts/5021/Keystone/view-part/?ref=eda, Controlled Revision="R5 2026-09-16; project-local frozen symbol/footprint", MF="Keystone Electronics", MP=5021, SnapEDA_Link=https://www.snapeda.com/parts/5021/Keystone/view-part/?ref=snap
TP_WIFI_UART_TX: library part EMG_R5_TP_WIFI_UART_TX, "UltraLow Profile THM Test Point-No Base", Package=None, Check_prices=https://www.snapeda.com/parts/5021/Keystone/view-part/?ref=eda, Controlled Revision="R5 2026-09-16; project-local frozen symbol/footprint", MF="Keystone Electronics", MP=5021, SnapEDA_Link=https://www.snapeda.com/parts/5021/Keystone/view-part/?ref=snap
U1: library part EMG_R5_U1, "None", Case/Package=TSSOP, Input Bias Current=100pA, Input Offset Voltage (Vos)=4.5mV, Max Operating Temperature=125°C, Max Supply Voltage=6V, Min Operating Temperature=-40°C, Min Supply Voltage=1.8V, Nominal Supply Current=45uA, Output Current=15mA, Power Supply Rejection Ratio (PSRR)=63dB, Voltage Gain=110dB, Amplifier Type="GENERAL PURPOSE", Common Mode Rejection Ratio=56dB, Controlled Revision="R5 2026-09-16; project-local frozen symbol/footprint", Gain Bandwidth Product=1MHz, Lead Free="Lead Free", Mount="Surface Mount", Number of Channels=4, Number of Circuits=4, Number of Elements=4, Number of Pins=14, Packaging="Tape and Reel", RoHS Compliant=Yes, Slew Rate=0.5V/µs, Supply Current=45uA, Technology=CMOS, Unity Gain Bandwidth Product=1MHz
U2: library part EMG_R5_U2, "None", Case/Package=TSSOP, Input Bias Current=100pA, Input Offset Voltage (Vos)=4.5mV, Max Operating Temperature=125°C, Max Supply Voltage=6V, Min Operating Temperature=-40°C, Min Supply Voltage=1.8V, Nominal Supply Current=45uA, Output Current=15mA, Power Supply Rejection Ratio (PSRR)=63dB, Voltage Gain=110dB, Amplifier Type="GENERAL PURPOSE", Common Mode Rejection Ratio=56dB, Controlled Revision="R5 2026-09-16; project-local frozen symbol/footprint", Gain Bandwidth Product=1MHz, Lead Free="Lead Free", Mount="Surface Mount", Number of Channels=4, Number of Circuits=4, Number of Elements=4, Number of Pins=14, Packaging="Tape and Reel", RoHS Compliant=Yes, Slew Rate=0.5V/µs, Supply Current=45uA, Technology=CMOS, Unity Gain Bandwidth Product=1MHz
U3: library part EMG_R5_U3, "None", Case/Package=TSSOP, Input Bias Current=100pA, Input Offset Voltage (Vos)=4.5mV, Max Operating Temperature=125°C, Max Supply Voltage=6V, Min Operating Temperature=-40°C, Min Supply Voltage=1.8V, Nominal Supply Current=45uA, Output Current=15mA, Power Supply Rejection Ratio (PSRR)=63dB, Voltage Gain=110dB, Amplifier Type="GENERAL PURPOSE", Common Mode Rejection Ratio=56dB, Controlled Revision="R5 2026-09-16; project-local frozen symbol/footprint", Gain Bandwidth Product=1MHz, Lead Free="Lead Free", Mount="Surface Mount", Number of Channels=4, Number of Circuits=4, Number of Elements=4, Number of Pins=14, Packaging="Tape and Reel", RoHS Compliant=Yes, Slew Rate=0.5V/µs, Supply Current=45uA, Technology=CMOS, Unity Gain Bandwidth Product=1MHz
U_EN1: library part EMG_R5_U_EN1, "Pushbutton On / Off  Controller with µP Interrupt, 8-pin SOT23 (TS8-8), -40 to 85 degC, Pb-Free, Mini Tape and Reel", Manufacturer="Linear Technology", Code_JEDEC=MO-193, ComponentLink1Description="Manufacturer URL", ComponentLink1URL=http://www.linear.com/, ComponentLink2Description=Datasheet, ComponentLink2URL=http://cds.linear.com/docs/en/datasheet/2954fb.pdf, ComponentLink3Description="Package Specification", ComponentLink3URL=http://cds.linear.com/docs/en/packaging/SOT_8_05-08-1637.pdf, Controlled Revision="R5 2026-09-16; project-local frozen symbol/footprint", DatasheetVersion="Rev. B", Mounting Technology="Surface Mount", Number of Supplies(#)=1, PackageDescription="8-Pin Plastic TSOT-23, Body 2.9 x 1.63 mm, Pitch 0.65 mm", PackageReference=TS8-8, PackageVersion="Rev. A, 08/2010", Packing="Mini Tape and Reel", PartNumber=LTC2954ITS8-1#TRMPBF, RoHS=TRUE
U_MCU1: library part EMG_R5_U_MCU1, "Integrated Circuit", Manufacturer_Name=STMicroelectronics, Mouser Part Number=511-STM32U575VIT6, Arrow Part Number=STM32U575VIT6, Arrow Price/Stock=https://www.arrow.com/en/products/stm32u575vit6/stmicroelectronics.html?utm_currency=USD&region=nac, Controlled Revision="R5 2026-09-16; project-local frozen symbol/footprint", Datasheet Link=https://www.st.com/resource/en/datasheet/stm32u575ag.pdf, Height=1.6mm, Manufacturer_Part_Number=STM32U575VIT6, Mouser Price/Stock=https://www.mouser.co.uk/ProductDetail/STMicroelectronics/STM32U575VIT6?qs=DRkmTr78QAR9I8TWG1L7Og%3D%3D
U_UV1: library part EMG_R5_U_UV1, "Low Quiescent Current, Programmable-Delay Supervisory Circuit, 1 Supply Monitored, -40 to 125 degC, 6-pin SOT-23 (DBV), Green (RoHS & no Sb/Br)", Manufacturer="Texas Instruments", Rating=Catalog, Threshold Voltage 1 (typ)(Typ)(V)=3.07, # of Supplies Monitored=1, Code_JEDEC=MO-178-AB*, ComponentLink1Description=Datasheet, ComponentLink1URL=http://www.ti.com/general/docs/lit/getliterature.tsp?genericPartNumber=TPS3808G33&fileType=pdf, Controlled Revision="R5 2026-09-16; project-local frozen symbol/footprint", DatasheetVersion=SBVS050J, Iq(Typ)(uA)=2.4, Mounting Technology="Surface Mount", Output Driver Type / Reset Output="Active-low, Open-drain", PackageDescription="6-Pin Plastic Small-Outline Package, 2.9 x 1.6 mm Body, 0.95 mm Pitch, 2.8 mm Lead Span", PackageReference=DBV0006A, PackageVersion="revK, Mar-2006", PartNumber=TPS3808G33DBVR, Reset Threshold Accuracy(%)=0.5, SubFamily="Supervisor and Reset IC", Time Delay(ms)=Programmable, VCC(Max)(V)=6.5, VCC(Min)(V)=1.7
U_WIFI1: library part EMG_R5_U_WIFI1, "Integrated Circuit", Manufacturer_Name=STMicroelectronics, Arrow Part Number=ST67W611M1A6BTR, Arrow Price/Stock=https://www.arrow.com/en/products/st67w611m1a6btr/stmicroelectronics.html?utm_currency=USD&region=nac, Controlled Revision="R5 2026-09-16; project-local frozen symbol/footprint", Datasheet Link=https://www.st.com/resource/en/datasheet/st67w611m1.pdf, Height=2.37mm, Manufacturer_Part_Number=ST67W611M1A6BTR
UP1: library part EMG_R5_UP1, "BQ24072T single-cell Li-ion charger with dynamic power path; OUT tracks battery +225mV with 3.4V minimum regulation under USB power", Manufacturer="Texas Instruments", Over Voltage Protection=N, Code_JEDEC=MO-220, ComponentLink1Description=Datasheet, ComponentLink1URL=http://www.ti.com/general/docs/lit/getliterature.tsp?genericPartNumber=BQ24072T&fileType=pdf, Controlled Revision="R5 2026-09-16; project-local frozen symbol/footprint", DatasheetVersion=SLUS937A, Eco-Plan="Green (RoHS & no Sb/Br)", Lead Acid=N, Li-Ion=Y, Li-Polymer=Y, Manufacturer Part Number=BQ24072TRGTR, Mounting Technology="Surface Mount", NiCd=N, NiMH=N, PackageDescription="16-Pin Plastic Quad Flat No-Lead, 3 x 3 mm Body, 0.5 mm Pitch, 1.7 x 1.7 mm Exposed Pad", PackageReference=RGT0016C, PackageVersion="revH, Oct-2011", PartNumber=BQ24072TRGTR, SubFamily="Battery Charge Management", Vin(Min)(V)=4.3
UP2: library part EMG_R5_UP2, "1.5-A output current, high-power-density buck-boost converter", Package="SOT-583 Texas Instruments", Check_prices=https://www.snapeda.com/parts/TPS631000DRLR/Texas+Instruments/view-part/?ref=eda, Controlled Revision="R5 2026-09-16; project-local frozen symbol/footprint", MF="Texas Instruments", MP=TPS631000DRLR, SnapEDA_Link=https://www.snapeda.com/parts/TPS631000DRLR/Texas+Instruments/view-part/?ref=snap
UP3: library part EMG_R5_UP3, "IC REG LINEAR 3V 300MA SOT23-5", Controlled Revision="R5 2026-09-16; project-local frozen symbol/footprint", RoHS Compliant=Yes
UP4: library part EMG_R5_UP4, "3ÂµA 1-Cell/2-Cell Fuel Gauge with ModelGauge", Package="TDFN-8 Maxim", Availability="In Stock", Check_prices=https://www.snapeda.com/parts/MAX17048G+T10/Analog+Devices/view-part/?ref=eda, Controlled Revision="R5 2026-09-16; project-local frozen symbol/footprint", MF="Analog Devices", MP=MAX17048G+T10, Price=None, Purchase-URL=https://pricing.snapeda.com/search/part/MAX17048G+T10/?ref=eda, SnapEDA_Link=https://www.snapeda.com/parts/MAX17048G+T10/Analog+Devices/view-part/?ref=snap
X_WIFI_32K: library part EMG_R5_X_WIFI_32K, "Epson FC-135 32.768 kHz 9 pF +/-20 ppm, ESR 70 kohm max, 3.2x1.5 mm, 2 terminals", Frequency="32.768 kHz", Load Capacitance="9 pF", Manufacturer="Seiko Epson Corporation", Package="SMD3215 / 3.2 x 1.5 mm / 2 terminal", Temperature Range="-40 to +85 degC", Tolerance="+/-20 ppm at 25 degC, 0.1 uW", Controlled Revision="R5 2026-09-16; project-local frozen symbol/footprint", Datasheet Link=https://download.epsondevice.com/td/pdf/td_xtal_32khz/FC-135_Q13FC13500003_en.pdf, Drive Level="0.1 uW nominal; 0.5 uW maximum", ESR="70 kohm maximum", Height="0.8 +/-0.1 mm", Manufacturer Part Number=Q13FC13500003, Packaging Note="Q13FC13500003xx; xx=00 is 3000/reel"

## Via types
v1: diameter 19.68, hole 11.81, L1 TOP to L4 BOTTOM GND, 5 vias

## Nets (pads, with @x,y where several pads share a name; then routed paths per layer and width w, separated by ;. In a path a pad name is that pad's centre, name@x,y a point inside that pad or via, vN(x,y) a via of type N, cw(c..) or ccw(c..) an arc to the next point about the centre after c; other vN are vias at no path point)
3V0_ANA: C1_MCU.1 C2_MCU.2 C3_MCU.1 C4_MCU.2 CCU1.1 CCU2.2 CCU3.2 CCU4.1 CCU5.2 CCU6.1 CCU7.2 CCU8.1 CCU9.2 CCU10.1 Cdiv.2 CU_11.2 CU_12.2 CU_14.2 CU_21.1 CU_22.1 CU_24.1 CUP5_2.2 CUP5_3.2 INA1.5 INA2.5 INA3.5 INA4.5 INA5.5 J_FPC1.P1_1 J_FPC1.P1_2 J_FPC1.P1_3 J_FPC2.P1_1 J_FPC2.P1_2 J_FPC2.P1_3 J_FPC3.P1_1 J_FPC3.P1_2 J_FPC3.P1_3 J_FPC4.P1_1 J_FPC4.P1_2 J_FPC4.P1_3 J_FPC5.P1_1 J_FPC5.P1_2 J_FPC5.P1_3 RV2.1 U1.4 U2.4 U3.4 U_MCU1.21 U_MCU1.22 UP3.5
3V3_DIG: C_MCU_BULK.1 C_MCU_VDD1.2 C_MCU_VDD2.2 C_MCU_VDD3.2 C_MCU_VDD4.1 C_MCU_VDD5.1 C_VBAT.2 C_VDDUSB.1 C_WIFI_BULK.2 C_WIFI_VDD33.1 C_WIFI_VDD33_HF.1 C_WIFI_VDDIO1.2 C_WIFI_VDDIO1_HF.1 C_WIFI_VDDIO2.2 C_WIFI_VDDIO2_HF.2 CUP4.1 CUP4_FB.2 CUP5_1.1 CUP5_5.1 J_SWD.1 R_AL.2 R_INT_PULLUP.1 R_KILL_PU.2 R_NRST.2 R_PGOOD.2 R_SCL.2 R_SDA.2 R_WIFI_BOOT_OVR.1 RUP_3.2 U_MCU1.6 U_MCU1.11 U_MCU1.28 U_MCU1.50 U_MCU1.73 U_MCU1.75 U_MCU1.100 U_WIFI1.9 U_WIFI1.16 U_WIFI1.25 UP2.1 UP2.6 UP3.1
ADC_EMG1: C_ADC1.1 R_ADC1.2 U_MCU1.23
ADC_EMG2: C_ADC2.1 R_ADC2.2 U_MCU1.24
ADC_EMG3: C_ADC3.1 R_ADC3.2 U_MCU1.25
ADC_EMG4: C_ADC4.1 R_ADC4.2 U_MCU1.26
ADC_EMG5: C_ADC5.1 R_ADC5.2 U_MCU1.29
AFE_EN: R_EN_PD.1 U_MCU1.85 UP3.3
BAT_TEMP: J_Li-Po.2 R_TH_BAT.2 R_TS_BOTTOM.2 R_TS_SER.1 R_TS_TOP.1
FG_ALRT: R_AL.1 U_MCU1.81 UP4.5
GND: C1_EN1.1 C1_MCU.2 C2_EN1.2 C2_MCU.1 C3_EN1.1 C3_MCU.2 C4_MCU.1 C_ADC1.2 C_ADC2.2 C_ADC3.2 C_ADC4.2 C_ADC5.2 C_BAT.2 C_IN_.2 C_MCU_BULK.2 C_MCU_VDD1.1 C_MCU_VDD2.1 C_MCU_VDD3.1 C_MCU_VDD4.2 C_MCU_VDD5.2 C_NRST.2 C_OUT_.2 C_UV_BYPASS.2 C_VBAT.1 C_VBUS.1 C_VDDUSB.2 C_WIFI_BULK.1 C_WIFI_EN.2 C_WIFI_VDD33.2 C_WIFI_VDD33_HF.2 C_WIFI_VDDIO1.1 C_WIFI_VDDIO1_HF.2 C_WIFI_VDDIO2.1 C_WIFI_VDDIO2_HF.1 C_WIFI_X32_IN.1 C_WIFI_X32_OUT.1 CCU1.2 CCU2.1 CCU3.1 CCU4.2 CCU5.1 CCU6.2 CCU7.1 CCU8.2 CCU9.1 CCU10.2 Cdiv.1 Cdiv_1.1 Cdiv_10uF.1 CU6_1.1 CU_11.1 CU_12.1 CU_14.1 CU_21.2 CU_22.2 CU_24.2 CUP4.2 CUP4_1.2 CUP5_1.2 CUP5_2.1 CUP5_3.1 CUP5_5.2 D_CC_ESD.3 D_VBUS.2 INA1.1 INA1.4 INA2.1 INA2.4 INA3.1 INA3.4 INA4.1 INA4.4 INA5.1 INA5.4 J_FPC1.1 J_FPC1.3 J_FPC1.5 J_FPC1.7 J_FPC1.9 J_FPC1.10 J_FPC1.P2_1 J_FPC1.P2_2 J_FPC1.P2_3 J_FPC2.1 J_FPC2.3 J_FPC2.5 J_FPC2.7 J_FPC2.9 J_FPC2.10 J_FPC2.P2_1 J_FPC2.P2_2 J_FPC2.P2_3 J_FPC3.1 J_FPC3.3 J_FPC3.5 J_FPC3.7 J_FPC3.9 J_FPC3.10 J_FPC3.P2_1 J_FPC3.P2_2 J_FPC3.P2_3 J_FPC4.1 J_FPC4.3 J_FPC4.5 J_FPC4.7 J_FPC4.9 J_FPC4.10 J_FPC4.P2_1 J_FPC4.P2_2 J_FPC4.P2_3 J_FPC5.1 J_FPC5.3 J_FPC5.5 J_FPC5.7 J_FPC5.9 J_FPC5.10 J_FPC5.P2_1 J_FPC5.P2_2 J_FPC5.P2_3 J_Li-Po.1 J_SWD.3 J_USB_C.A1_B12 J_USB_C.B1_A12 J_USB_C.SH1 J_USB_C.SH2 J_USB_C.SH3 J_USB_C.SH4 MCU_VCAP.1 PWR_BTN_N.C PWR_BTN_N.D Q_SHDN.2 R_EN_PD.2 R_LIM.1 R_MCU_BOOT0_PD.1 R_SHDN_PD.1 R_TH_BAT.1 R_TMR.1 R_TS_BOTTOM.1 R_WIFI_BOOT_PD.1 R_WIFI_CS_PD.2 R_WIFI_EN_PD.2 RISET.2 RJ1.1 RJ2.1 RUP_4.1 RV1.2 TP_GND.TP U1.11 U2.11 U3.11 U_EN1.4 U_MCU1.10 U_MCU1.19 U_MCU1.20 U_MCU1.27 U_MCU1.49 U_MCU1.74 U_MCU1.99 U_UV1.2 U_WIFI1.10 U_WIFI1.15 U_WIFI1.18 U_WIFI1.26 U_WIFI1.30 U_WIFI1.32 U_WIFI1.33 U_WIFI1.34 U_WIFI1.35 U_WIFI1.36 UP1.4 UP1.5 UP1.8 UP1.15 UP1.17@905.51,1771.65 UP2.7 UP3.2 UP4.1 UP4.4 UP4.6 UP4.9
  other v1: 885.83,1751.97 925.2,1751.97 905.51,1771.65 885.83,1791.34 925.2,1791.34
I2C_SCL: R_SCL.1 U_MCU1.95 UP4.7
I2C_SDA: R_SDA.1 U_MCU1.96 UP4.8
INA_OUT_1: CL_1.2 INA1.8 RH_1.1 Rservo_1.2
INA_OUT_2: CL_2.2 INA2.8 RH_2.1 Rservo_2.2
INA_OUT_3: CL_3.2 INA3.8 RH_3.1 Rservo_3.2
INA_OUT_4: CL_4.2 INA4.8 RH_4.1 Rservo_4.2
INA_OUT_5: CL_5.2 INA5.8 RH_5.1 Rservo_5.2
KILL_CTRL: Q_SHDN.3 R_KILL_PU.1 U_EN1.8
MCU_BOOT0: R_MCU_BOOT0_PD.2 TP_MCU_BOOT0.TP U_MCU1.94
MCU_NRST: C_NRST.1 J_SWD.5 R_NRST.1 U_MCU1.14
MCU_PWR_INT_N: R_INT_PULLUP.2 U_EN1.5 U_MCU1.83
MCU_SHUTDOWN: R_SHDN_G.2 U_MCU1.86
MCU_SPI_MISO: R_SPI_MISO.2 U_MCU1.31
MCU_SPI_MOSI: R_SPI_MOSI.2 U_MCU1.32
MCU_SPI_SCK: R_SPI_SCK.2 U_MCU1.30
MCU_SWCLK: J_SWD.4 U_MCU1.76
MCU_SWDIO: J_SWD.2 U_MCU1.72
MCU_VCAP: MCU_VCAP.2 U_MCU1.48
MCU_WIFI_CS: R_SPI_CS.2 U_MCU1.35
MCU_WIFI_UART_RX: R_WIFI_UART_RX_LINK.2 U_MCU1.69
MCU_WIFI_UART_TX: R_WIFI_UART_TX_LINK.2 U_MCU1.68
NetC1_EN1_2: C1_EN1.2 R_EN1_1.2 U_EN1.1
NetC2_EN1_1: C2_EN1.1 U_EN1.3
NetC3_EN1_2: C3_EN1.2 U_EN1.7
NetC_WIFI_X32_IN_2: C_WIFI_X32_IN.2 R_WIFI_X32_IN.1 X_WIFI_32K.1
NetC_WIFI_X32_OUT_2: C_WIFI_X32_OUT.2 R_WIFI_X32_OUT.1 X_WIFI_32K.2
NetCH_1_2: CH_1.2 RG_1.1 RGN_1.2 U1.2
NetCH_2_2: CH_2.2 RG_2.1 RGN_2.2 U2.2
NetCH_3_2: CH_3.2 RG_3.1 RGN_3.2 U2.9
NetCH_4_2: CH_4.2 RG_4.1 RGN_4.2 U3.2
NetCH_5_2: CH_5.2 RG_5.1 RGN_5.2 U3.9
NetCL_1_1: CL_1.1 RGN_1.1
NetCL_2_1: CL_2.1 RGN_2.1
NetCL_3_1: CL_3.1 RGN_3.1
NetCL_4_1: CL_4.1 RGN_4.1
NetCL_5_1: CL_5.1 RGN_5.1
NetCservo_1_1: Cservo_1.1 Rservo_1.1 U1.6
NetCservo_2_1: Cservo_2.1 Rservo_2.1 U2.6
NetCservo_3_1: Cservo_3.1 Rservo_3.1 U2.13
NetCservo_4_1: Cservo_4.1 Rservo_4.1 U3.6
NetCservo_5_1: Cservo_5.1 Rservo_5.1 U3.13
NetCUP4_FB_1: CUP4_FB.1 RUP_3.1 RUP_4.2 UP2.8
NetD_CC_ESD_1: D_CC_ESD.1 J_USB_C.A5 RJ1.2
NetD_CC_ESD_2: D_CC_ESD.2 J_USB_C.B5 RJ2.2
NetINA1_2: INA1.2 RDD2.2
NetINA1_3: INA1.3 RDD1.2 RDD3.2
NetINA1_7: INA1.7 RH_1.2 RL_1.1
NetINA2_2: INA2.2 RDD5.2
NetINA2_3: INA2.3 RDD4.2 RDD6.2
NetINA2_7: INA2.7 RH_2.2 RL_2.1
NetINA3_2: INA3.2 RDD8.2
NetINA3_3: INA3.3 RDD7.2 RDD9.2
NetINA3_7: INA3.7 RH_3.2 RL_3.1
NetINA4_2: INA4.2 RDD11.2
NetINA4_3: INA4.3 RDD10.2 RDD12.2
NetINA4_7: INA4.7 RH_4.2 RL_4.1
NetINA5_2: INA5.2 RDD14.2
NetINA5_3: INA5.3 RDD13.2 RDD15.2
NetINA5_7: INA5.7 RH_5.2 RL_5.1
NetJ_FPC1_8: J_FPC1.8 R_VREF1.2
NetJ_FPC2_8: J_FPC2.8 R_VREF2.2
NetJ_FPC3_8: J_FPC3.8 R_VREF3.2
NetJ_FPC4_8: J_FPC4.8 R_VREF4.2
NetJ_FPC5_8: J_FPC5.8 R_VREF5.2
NetJ_REF_1: J_REF.1 J_REF.2 R_ref.1
NetJP_WIFI_BOOT_1: JP_WIFI_BOOT.1 R_WIFI_BOOT_OVR.2
NetL1_1: L1.1 UP2.3
NetL1_2: L1.2 UP2.2
NetLED_CHG_A: LED_CHG.A R_CHG_LED.2
NetLED_CHG_C: LED_CHG.C UP1.9
NetPWR_BTN_N_A: PWR_BTN_N.A PWR_BTN_N.B U_EN1.2
NetQ_SHDN_1: Q_SHDN.1 R_SHDN_G.1 R_SHDN_PD.2
NetR_EN1_BIAS_2: R_EN1_BIAS.2 UP1.6
NetR_LIM_2: R_LIM.2 UP1.12
NetR_TMR_2: R_TMR.2 UP1.14
NetRISET_1: RISET.1 UP1.16
SYS_EN: R_EN.2 U_EN1.6 U_UV1.1 UP2.5
TS: R_TS_SER.2 UP1.1
USB_PGOOD_N: R_PGOOD.1 U_MCU1.82 UP1.7
Va_1: J_FPC1.2 RDD1.1
Va_2: J_FPC2.2 RDD4.1
Va_3: J_FPC3.2 RDD7.1
Va_4: J_FPC4.2 RDD10.1
Va_5: J_FPC5.2 RDD13.1
Vb_1: J_FPC1.4 RDD2.1
Vb_2: J_FPC2.4 RDD5.1
Vb_3: J_FPC3.4 RDD8.1
Vb_4: J_FPC4.4 RDD11.1
Vb_5: J_FPC5.4 RDD14.1
VBAT_CELL: C_BAT.1 CU6_1.2 J_Li-Po.3 UP1.2 UP1.3 UP4.2 UP4.3
VBUS: C_IN_.1 C_VBUS.2 D_VBUS.1 J_USB_C.A4_B9 J_USB_C.B4_A9 R_TS_TOP.2 UP1.13
Vc_1: J_FPC1.6 RDD3.1
Vc_2: J_FPC2.6 RDD6.1
Vc_3: J_FPC3.6 RDD9.1
Vc_4: J_FPC4.6 RDD12.1
Vc_5: J_FPC5.6 RDD15.1
VDiv: Cdiv_1.2 Cdiv_10uF.2 RV1.1 RV2.2 U1.10 U1.12
VOUT_1: CH_1.1 R_ADC1.1 RG_1.2 U1.1
VOUT_2: CH_2.1 R_ADC2.1 RG_2.2 U2.1
VOUT_3: CH_3.1 R_ADC3.1 RG_3.2 U2.8
VOUT_4: CH_4.1 R_ADC4.1 RG_4.2 U3.1
VOUT_5: CH_5.1 R_ADC5.1 RG_5.2 U3.8
VREF_A: RL_1.2 RL_2.2 RL_3.2 RL_4.2 RL_5.2 U1.3 U1.5 U1.8 U1.9 U2.3 U2.5 U2.10 U2.12 U3.3 U3.5 U3.10 U3.12
VREF_B_SRC: R_ref.2 R_VREF1.1 R_VREF2.1 R_VREF3.1 R_VREF4.1 R_VREF5.1 U1.13 U1.14
Vservo_1: Cservo_1.2 INA1.6 U1.7
Vservo_2: Cservo_2.2 INA2.6 U2.7
Vservo_3: Cservo_3.2 INA3.6 U2.14
Vservo_4: Cservo_4.2 INA4.6 U3.7
Vservo_5: Cservo_5.2 INA5.6 U3.14
VSYS: C_OUT_.1 C_UV_BYPASS.1 CUP4_1.1 R_CHG_LED.1 R_EN1_1.1 R_EN1_BIAS.1 R_EN.1 U_UV1.3 U_UV1.5 U_UV1.6 UP1.10 UP1.11 UP2.4
WIFI_BOOT: JP_WIFI_BOOT.2 R_WIFI_BOOT_PD.2 TP_WIFI_BOOT.TP U_MCU1.91 U_WIFI1.3
WIFI_CHIP_EN: C_WIFI_EN.1 R_WIFI_EN_PD.1 TP_WIFI_CHIP_EN.TP U_MCU1.87 U_WIFI1.17
WIFI_SPI_CLK: R_SPI_SCK.1 U_WIFI1.28
WIFI_SPI_CS: R_SPI_CS.1 R_WIFI_CS_PD.1 U_WIFI1.24
WIFI_SPI_MISO: R_SPI_MISO.1 U_WIFI1.29
WIFI_SPI_MOSI: R_SPI_MOSI.1 U_WIFI1.27
WIFI_SPI_RDY: U_MCU1.89 U_WIFI1.21
WIFI_UART_RX: R_WIFI_UART_TX_LINK.1 TP_WIFI_UART_RX.TP U_WIFI1.23
WIFI_UART_TX: R_WIFI_UART_RX_LINK.1 TP_WIFI_UART_TX.TP U_WIFI1.22
WIFI_X32_RAW_IN: R_WIFI_X32_IN.2 U_WIFI1.14
WIFI_X32_RAW_OUT: R_WIFI_X32_OUT.2 U_WIFI1.13
pads on no net: J_USB_C. J_USB_C.A6 J_USB_C.A7 J_USB_C.A8 J_USB_C.B6 J_USB_C.B7 J_USB_C.B8 U_MCU1.1 U_MCU1.2 U_MCU1.3 U_MCU1.4 U_MCU1.5 U_MCU1.7 U_MCU1.8 U_MCU1.9 U_MCU1.12 U_MCU1.13 U_MCU1.15 U_MCU1.16 U_MCU1.17 U_MCU1.18 U_MCU1.33 U_MCU1.34 U_MCU1.36 U_MCU1.37 U_MCU1.38 U_MCU1.39 U_MCU1.40 U_MCU1.41 U_MCU1.42 U_MCU1.43 U_MCU1.44 U_MCU1.45 U_MCU1.46 U_MCU1.47 U_MCU1.51 U_MCU1.52 U_MCU1.53 U_MCU1.54 U_MCU1.55 U_MCU1.56 U_MCU1.57 U_MCU1.58 U_MCU1.59 U_MCU1.60 U_MCU1.61 U_MCU1.62 U_MCU1.63 U_MCU1.64 U_MCU1.65 U_MCU1.66 U_MCU1.67 U_MCU1.70 U_MCU1.71 U_MCU1.77 U_MCU1.78 U_MCU1.79 U_MCU1.80 U_MCU1.84 U_MCU1.88 U_MCU1.90 U_MCU1.92 U_MCU1.93 U_MCU1.97 U_MCU1.98 U_UV1.4 U_WIFI1.1 U_WIFI1.2 U_WIFI1.4 U_WIFI1.5 U_WIFI1.6 U_WIFI1.7 U_WIFI1.8 U_WIFI1.11 U_WIFI1.12 U_WIFI1.19 U_WIFI1.20 U_WIFI1.31 UP1.17@905.51,1771.65 UP3.4